# Altium PCB Game Joystick 510.PcbDoc (part 1 of 2)
Units mil, origin at the board's own origin, x right, y up, seen from the top; angles counter-clockwise.
Board outline 4889.97 x 4392.01 mil, 2 copper layers (Top Layer, Bottom Layer); 77 components, 82 nets, 383 pads, 99 vias.
Unrouted connection lines stored in the file: 79.
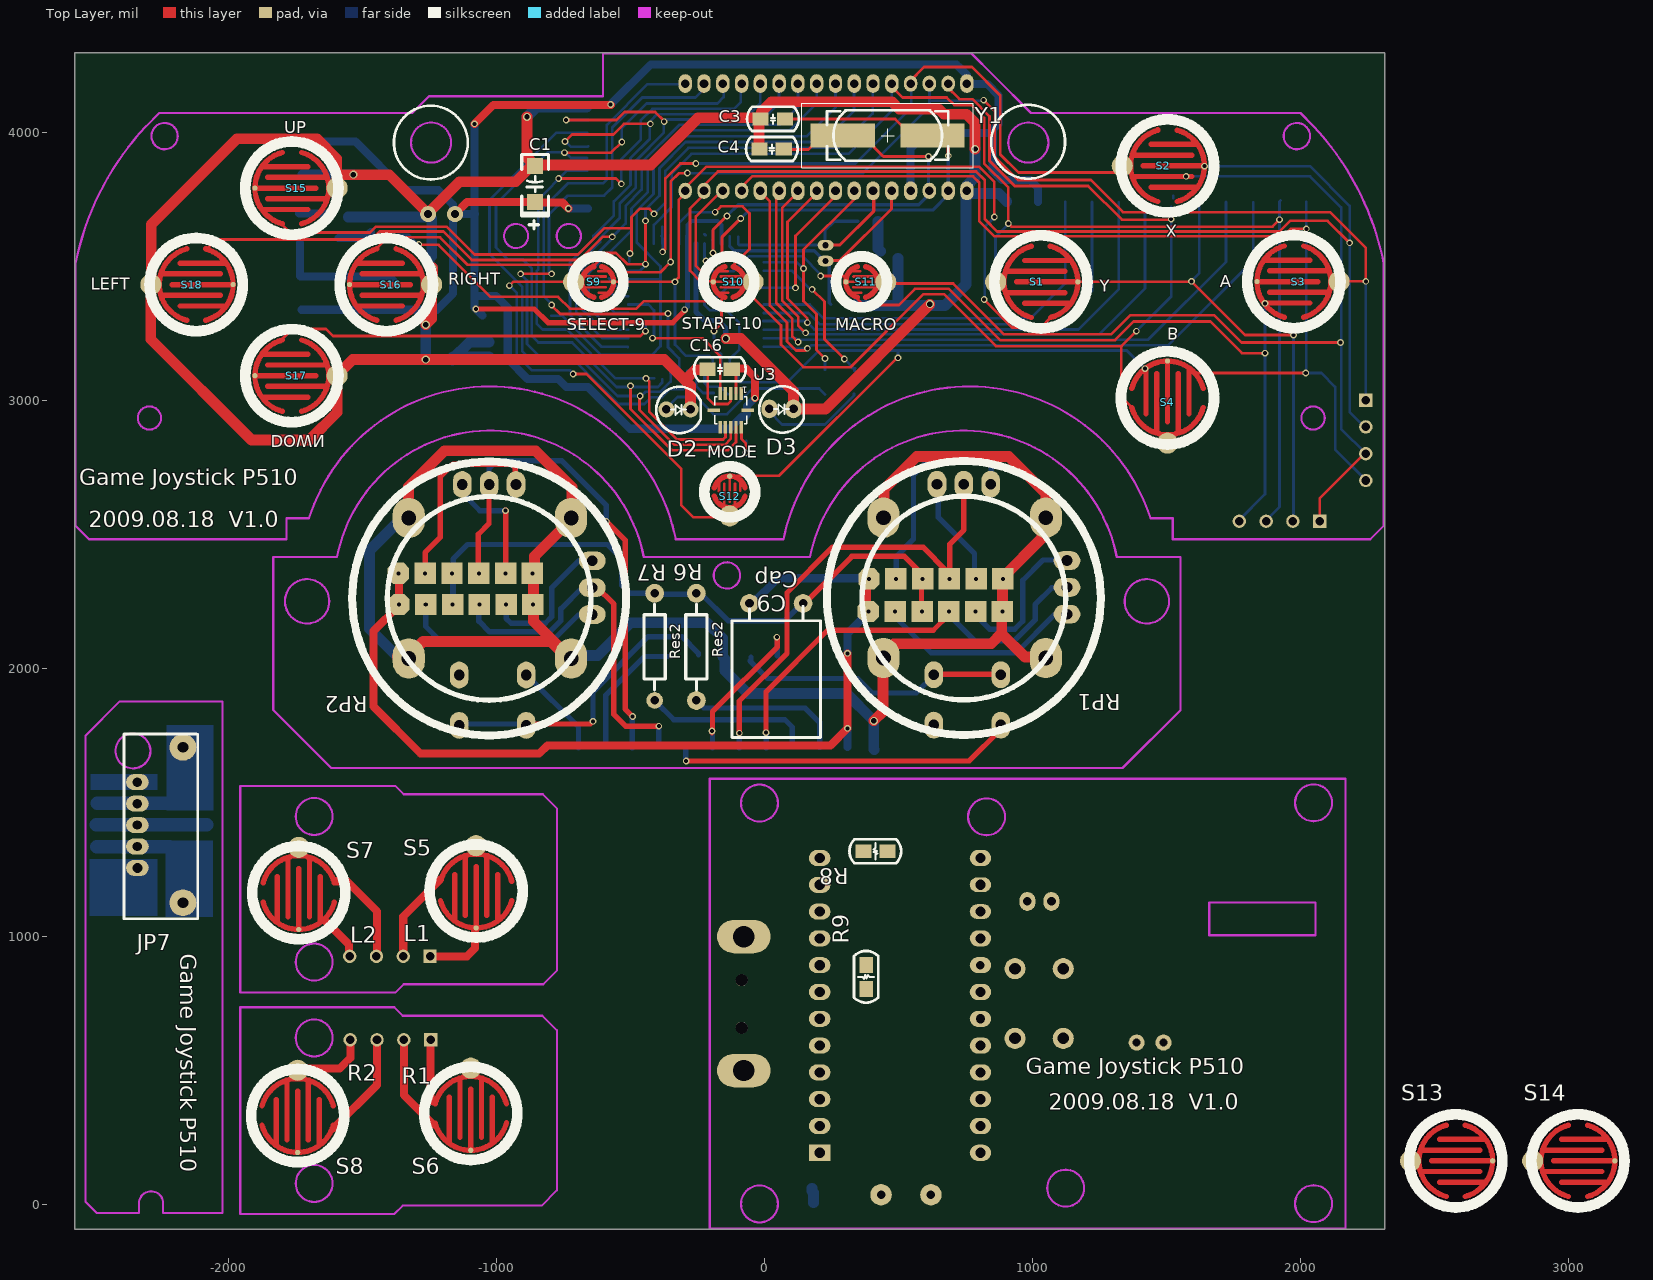
[diagram p0: Top Layer view]
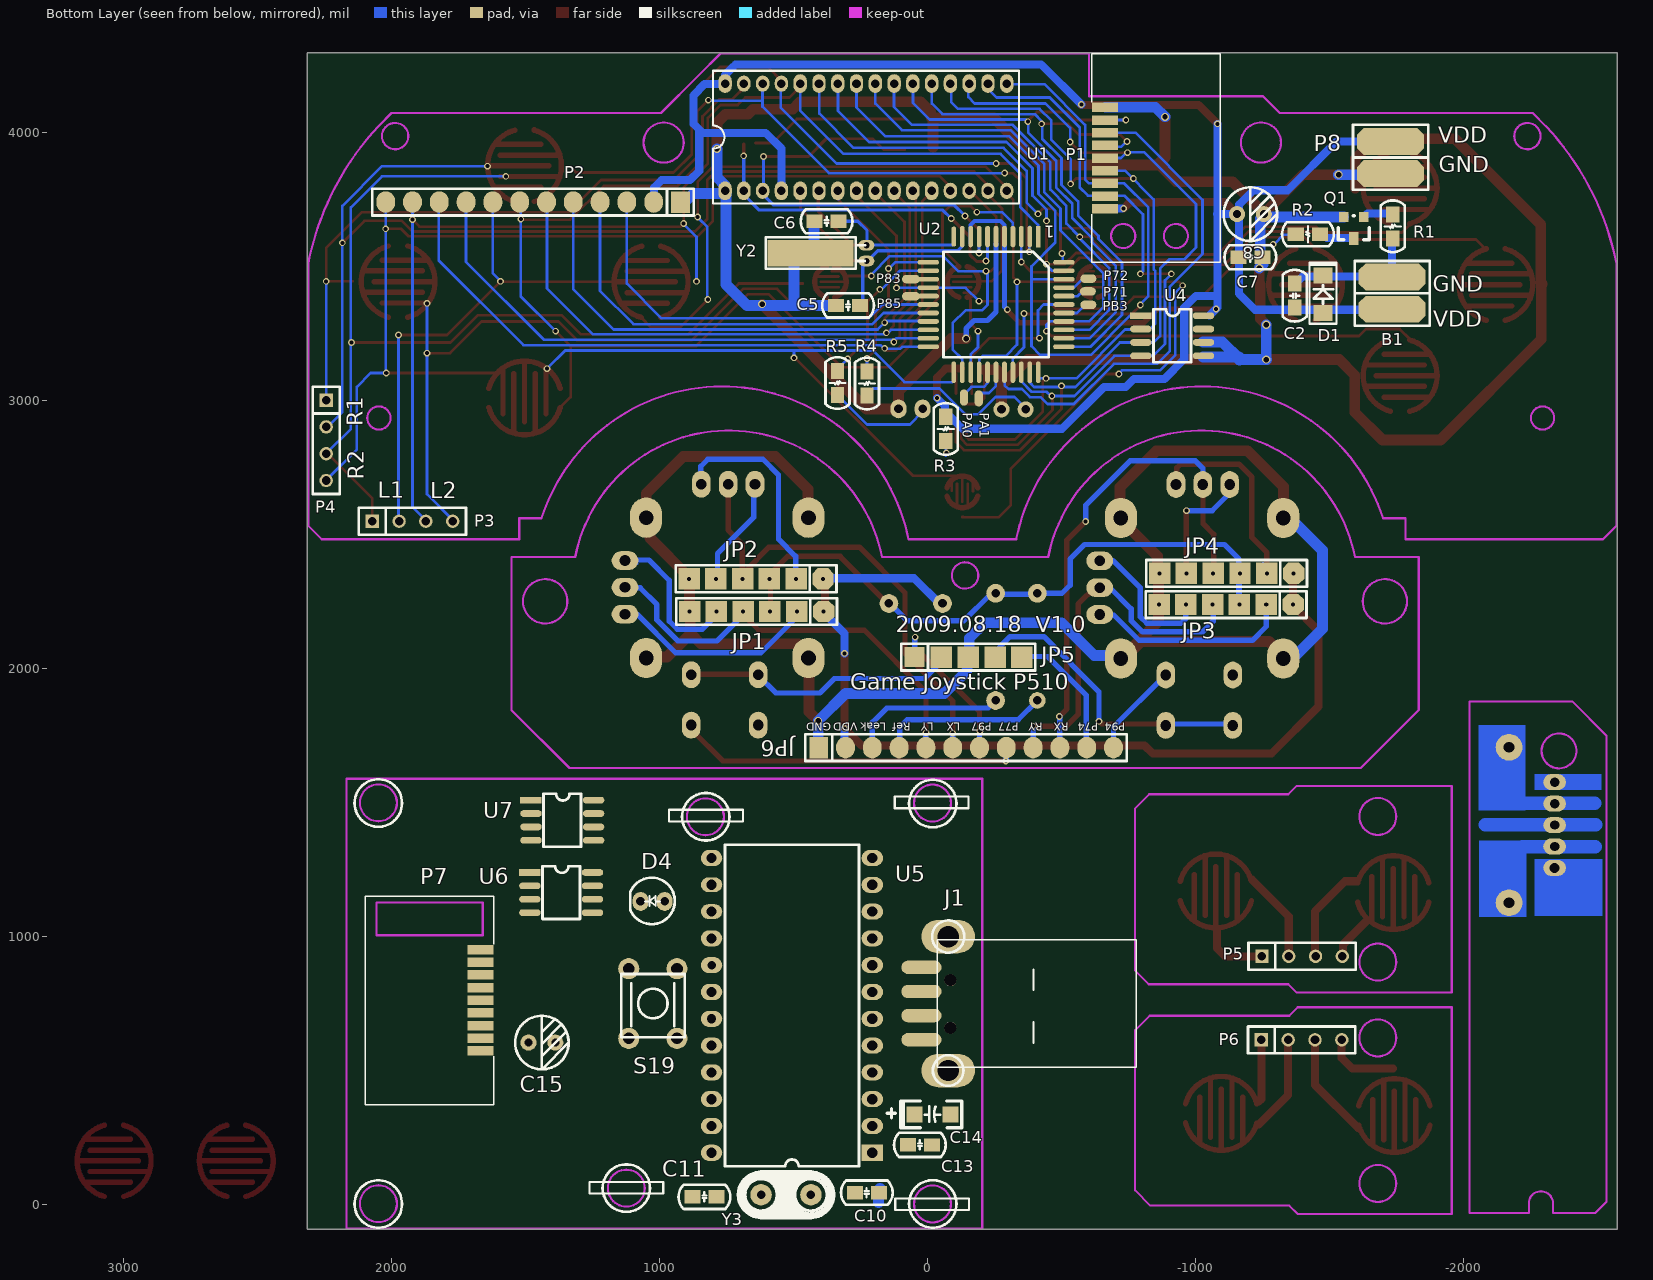
[diagram p1: Bottom Layer view, seen from below]

## Layer stack, top to bottom
Top Layer: signal copper 1.4
Dielectric: dielectric 12.6, FR-4, Dk 4.8
Bottom Layer: signal copper 1.4

## Board outline
-2575.91,-93.24 2314.06,-93.24 2314.06,4298.76 -2575.91,4298.76

## Design rules (kind name [scope] priority, off if disabled: settings)
Clearance [All] p1: gap=8
ComponentClearance [All] p1: gap=2 collisioncheckmode=3 verticalgap=10 showdistances=FALSE
FanoutControl Fanout_LCC [All] p1 off: bgadir=Out bgaviamode=Centered fanoutstyle=Auto fanoutdirection=Alternating viagrid=1 // Protel DXP Scope 1 Expression Was: IsLCC   Fanout_LCC (Default Rule)
FanoutControl Fanout_BGA [All] p2 off: bgadir=Out bgaviamode=Centered fanoutstyle=Auto fanoutdirection=Alternating viagrid=1 // Protel DXP Scope 1 Expression Was: IsBGA   Fanout_BGA (Default Rule)
FanoutControl Fanout_SOIC [All] p3 off: bgadir=Out bgaviamode=Centered fanoutstyle=Auto fanoutdirection=Alternating viagrid=1 // Protel DXP Scope 1 Expression Was: IsSOIC   Fanout_SOIC (Default Rule)
FanoutControl Fanout_Default [All] p4: bgadir=Out bgaviamode=Centered fanoutstyle=Auto fanoutdirection=Alternating viagrid=1 // Fanout_Default (Default Rule)
FanoutControl Fanout_Small [All] p5 off: bgadir=Out bgaviamode=Centered fanoutstyle=Auto fanoutdirection=Alternating viagrid=1 // Protel DXP Scope 1 Expression Was: (CompPinCount < 5)   Fanout_Small (Default Rule)
PolygonConnect [All] p1: connectstyle=Relief reliefconductorwidth=10 reliefentries=4 polygonreliefangle="90 Angle"
RoutingVias [All] p1: holewidth=15 width=25 viastyle="Through Hole" minholewidth=15 minwidth=25 maxholewidth=20 maxwidth=30
SolderMaskExpansion [All] p1: expansion=4
TestPointUsage [All] p1: valid=0 allowmultiple=FALSE
Testpoint [All] p1: side=15 testpointundercomponent=TRUE minsize=40 maxsize=100 preferedsize=60 minholesize=0 maxholesize=40 preferedholesize=32 testpointgrid=1 style=1023 order=0-112345678
Width [All] p1: maxlimit=50 minlimit=8 preferedwidth=10
13 further rules are at their usual default settings.

## Classes and differential pairs
component class EM78M611RX: C10 C11 C12 C13 C14 C15 D4 J1 P7 R8 R9 S19 U5 U6 U7 Y3
component class "Game Joystick rocker": C9 JP1 JP2 JP3 JP4 JP5 JP6 R6 R7 RP1 RP2
component class EM78P510_EM198810: B1 C1 C2 C3 C4 C5 C6 C7 C8 C16 D1 D2 D3 JP7 P1 P2 P3 P4 P5 P6 P8 Q1 R1 R2 R3 R4 R5 S1 S2 S3 S4 S5 S6 S7 S8 S9 S10 S11 S12 S13 S14 S15 S16 S17 S18 u1 U2 U3 U4 Y1 Y2

## Components (designator, comment, footprint, x,y, rotation, side; value= is the part's Value field where it differs from the comment)
B1 "Motor" SIP2 -1735.16,3350.76 r90 bottom
C1 "Cap Pol1" C1206-2 -857.16,3740.76 r90 top
C2 "Cap" C0805 -1371.16,3436.76 r270 bottom
C3 "Cap" C0805 -15.16,4050.76 r0 top
C4 "Cap" C0805 -19.16,3938.76 r0 top
C5 "Cap" C0805 340.84,3354.76 r180 bottom
C6 "Cap" C0805 420.84,3668.76 r180 bottom
C7 "Cap" C0805 -1251.16,3534.76 r0 bottom
C8 "Cap Pol1" RB5 -1156,3695.51 r180 bottom
C9 "Cap" CAPL 42.9,2242.76 r0 top
C10 "Cap" c0805 180,44 r0 bottom
C11 "Cap" c0805 786,28 r0 bottom
C13 "Cap" c0805 -18,222 r0 bottom
C14 "Cap Pol1" C1206-2 48,336 r180 bottom
C15 "Cap Pol1" RB5 1488,604 r180 bottom
C16 "Cap" C0805 -213.16,3116.76 r0 top
D1 "4148" D1407 -1477.16,3326.76 r90 bottom
D2 "LED1" led-3#1 -277.1,2966.76 r180 top locked
D3 "LED2" LED-3 107.23,2968.79 r180 top locked
D4 "LED" led-3#2 1069.9,1130.65 r180 bottom
J1 "353576-1" USBSD -3.16,894.76 r0 bottom locked
JP1 "HEADER 6" SIP6 386.9,2212.76 r0 bottom
JP2 "HEADER 6" SIP6 388.9,2334.76 r0 bottom
JP3 "HEADER 6" SIP6 -1365.1,2238.76 r0 bottom
JP4 "HEADER 6" SIP6 -1367.1,2354.76 r0 bottom
JP5 "HEADER 5" SIP5 46.9,2042.76 r180 bottom
JP6 "Header 12" SIP12 404.9,1704.76 r180 bottom
JP7 "HEADER 7" CON5 -2341.29,1255.8 r180 top
P1 "Header 9H" RFM -663.16,3715.97 r90 bottom
P2 "Header 12" SIP12 920.9,3740.76 r0 bottom
P3 "L1L2" SIP4 2070.9,2549.51 r180 bottom
P4 "R1R2" SIP4 2242.9,3001.51 r270 bottom
P5 "L1L2" SIP4 -1249.1,926.09 r180 bottom
P6 "R1R2" SIP4 -1247.1,614.09 r180 bottom
P7 "Header 9H" rfm 1666.9,950.76 r270 bottom
P8 "POWER" SIP2 -1729.16,3956.76 r270 bottom
Q1 "8050" SOT-23 -1629.16,3684.76 r0 bottom
R1 "Res2" R0805 -1737.16,3604.76 r90 bottom
R2 "Res2" R0805 -1375.16,3620.76 r180 bottom
R3 "Res2" R0805 -69.1,2939.51 r270 bottom
R4 "Res2" R0805 224.84,3108.76 r270 bottom
R5 "Res2" R0805 334.84,3110.76 r270 bottom
R6 "Res2" AXIAL0.4#1 -255.1,1880.76 r90 top
R7 "Res2" AXIAL0.4#2 -411.1,1880.76 r90 top
R8 "Res2" R0805 458,1318 r180 top
R9 "Res2" R0805 378,804 r90 top
RP1 "Rocker" Rocker 442.9,2562.76 r180 top locked
RP2 "Rocker" Rocker -1328.5,2561.66 r180 top locked
S1 "Y" KeyPad1#1 1168.25,3442.79 r0 top locked
S2 "X" KeyPad1#2 1640.69,3875.86 r0 top locked
S3 "A" KeyPad1#3 1836.69,3443.86 r180 top locked
S4 "B" KeyPad1#4 1502.9,3147.51 r90 top locked
S5 "L1-5" KeyPad1#5 -1077.1,1032 r270 top
S6 "R1-6" KeyPad1#6 -1097.1,202 r270 top
S7 "L2-7" KeyPad1#6 -1739.1,1026 r270 top
S8 "R2-8" KeyPad1#6 -1743.1,194 r270 top
S9 "SELECT-9" KeyPad2#1 -564.76,3442.79 r0 top locked
S10 "START-10" KeyPad2#2 -192.1,3442.76 r180 top
S11 "MACRO" KeyPad2#3 302.96,3442.79 r180 top locked
S12 "MODE" KeyPad2#4 -130.9,2717.59 r90 top locked
S13 "LSW1" KeyPad1#6 2716.36,162.69 r0 top
S14 "RSW2" KeyPad1#6 3172.36,162.69 r0 top
S15 "UP" KeyPad1#6 -1902.61,3792.71 r180 top locked
S16 "RIGHT" KeyPad1#6 -1549.7,3432.71 r180 top locked
S17 "DOWN" KeyPad1#6 -1902.61,3092.71 r180 top locked
S18 "LEFT" KeyPad1#1 -1984.11,3432.71 r0 top locked
S19 "RES" SW-PB 933.9,879.76 r270 bottom locked
U1 "EM78P510" SDIP32 754.41,3782.79 r180 bottom locked
U2 "EM78P510" QFP44 -257.16,3358.76 r0 bottom locked
U3 "BA020" LCC12 -127.1,2963.51 r180 top locked
U4 "93C46" SOP8 -797.16,3316.76 r270 bottom
U5 "EM78M611" DIP24 204.9,192.76 r0 bottom locked
U6 "24C02" sop8 1482.84,1238.76 r270 bottom
U7 "93C46" sop8 1478.84,1508.76 r270 bottom
Y1 "4M" XTAL1 550.84,3988.76 r180 top
Y2 "32768" XTAL2 226.84,3520.76 r90 bottom
Y3 "6M" CRY 434,36 r0 bottom

## Footprints (in the part's own frame and the unit in brackets; to place one, negate y for a bottom-side part, rotate by r counter-clockwise, add the part's x,y. Pads: shape width x height; smd on the part's side, far side on the other; paste and mask are expansions set on the pad)
AXIAL0.4#1 [mil]
  round 70 hole 32: 1(0,0) 2(400,0)
  silkscreen extent 40,-40 360,40
AXIAL0.4#2 [mil]
  round 62 hole 32: 1(0,0)
  round 70 hole 32: 2(400,0)
  silkscreen extent 40,-40 360,40
C0805 [mil]
  rect 60x50 smd: 1(0,0) 2(90.01,-0.01)
  silkscreen extent -51,-45 142,45
c0805 [mil]
  rect 60x50 smd: 1(0,0) 2(90.01,-0.01)
  silkscreen extent -51,-45 142,45
C1206-2 [mil]
  rect 60x60 smd: 1(0,0) 2(135,0)
  silkscreen extent -101,-50 177,50
CAPL [mil]
  round 70 hole 32: 1(100,0) 2(-100,0)
  silkscreen extent -165,-500 165,-10
CON5 [mil]
  oval 85x60 hole 38: 1(0,0)
  oval 85x60 hole 35: 2(0,-80) 3(0,-160) 4(0,-240) 5(0,-320)
  round 100 hole 40: 6(-170,130) 7(-170,-450)
  silkscreen extent -225,-500 50,190
CRY [mil]
  round 80 hole 32: 1(0,0) 2(186,0)
  silkscreen extent -85,-85 271,85
D1407 [mil]
  rect 60x70 smd: 1(0,0) 2(140,0)
  silkscreen extent -40,-50 188,50
DIP24 [mil]
  rect 80x60 hole 38: 1(0,0)
  oval 80x60 hole 38: 2(0,-100) 3(0,-200) 4(0,-300) 5(0,-400) 6(0,-500) 7(0,-600) 8(0,-700) 9(0,-800) 10(0,-900) 11(0,-1000) 12(0,-1100) 13(600,-1100) 16(600,-800) 18(600,-600) 20(600,-400) 21(600,-300) 22(600,-200) 23(600,-100) 24(600,0)
  oval 80x55 hole 38: 14(600,-1000) 15(600,-900)
  oval 80x60 hole 32: 17(600,-700)
  oval 80x60 hole 35: 19(600,-500)
  silkscreen extent 50,-1150 550,50
KeyPad1#1 [mm]
  round 0.5 smd: 1(0,0)
  round 2 smd: 2(-7.79,0)
  Top Layer lines w0.508: -6.675,-1.016 -1.214,-1.016 ; -6.675,1.016 -1.214,1.016 ; -5.786,0 -0.071,0 ; -5.024,-2.032 -0.796,-2.032 -0.706,-2.032 ; -5.024,2.032 -0.706,2.032 ; -4.409,-3.38 cw(c-3.5,0) -4.409,3.38 ; -2.597,3.381 cw(c-3.5,0) 0,0 cw(c-3.5,0) -0.674,-2.064 cw(c-3.5,0) -0.742,-2.155 cw(c-3.5,0) -0.796,-2.223 cw(c-3.5,0) -1.723,-3.016 cw(c-3.5,0) -2.198,-3.249 cw(c-3.5,0) -2.536,-3.365 cw(c-3.5,0) -2.591,-3.38
  silkscreen extent -7.91,-4.41 0.91,4.41
KeyPad1#2 [mm]
  round 0.5 smd: 1(0,0)
  round 2 smd: 2(-7.79,0)
  Top Layer lines w0.508: -6.675,-1.016 -1.723,-1.016 -1.214,-1.016 ; -6.675,1.016 -1.214,1.016 ; -5.786,0 -0.071,0 ; -5.024,-2.032 -0.796,-2.032 -0.706,-2.032 ; -5.024,2.032 -0.706,2.032 ; -4.409,-3.38 cw(c-3.5,0) -4.409,3.38 ; -2.597,3.381 cw(c-3.5,0) 0,0 cw(c-3.5,0) -0.674,-2.064 cw(c-3.5,0) -0.742,-2.155 cw(c-3.5,0) -0.796,-2.223 cw(c-3.5,0) -1.723,-3.016 cw(c-3.5,0) -2.198,-3.249 cw(c-3.5,0) -2.591,-3.38
  silkscreen extent -7.91,-4.41 0.91,4.41
KeyPad1#3 [mm]
  round 0.5 smd: 1(0,0)
  round 2 smd: 2(-7.79,0)
  Top Layer lines w0.508: -0.071,0 -5.786,0 ; -0.706,2.032 -0.766,2.032 -0.794,2.032 -2.849,2.032 -5.024,2.032 ; -0.706,-2.032 -0.796,-2.032 -5.024,-2.032 ; -1.214,1.016 -6.675,1.016 ; -1.214,-1.016 -6.675,-1.016 ; -2.591,-3.38 ccw(c-3.5,0) -2.198,-3.249 ccw(c-3.5,0) -1.723,-3.016 ccw(c-3.5,0) -0.796,-2.223 ccw(c-3.5,0) -0.742,-2.155 ccw(c-3.5,0) -0.674,-2.064 ccw(c-3.5,0) 0,0 ccw(c-3.5,0) -2.597,3.381 ; -4.409,3.38 ccw(c-3.5,0) -4.409,-3.38
  silkscreen extent -7.91,-4.41 0.91,4.41
KeyPad1#4 [mm]
  round 0.5 smd: 1(0,0)
  round 2 smd: 2(-7.79,0)
  Top Layer lines w0.508: -2.597,3.381 cw(c-3.5,0) 0,0 cw(c-3.5,0) -0.674,-2.064 cw(c-3.5,0) -0.742,-2.155 cw(c-3.5,0) -0.796,-2.223 cw(c-3.5,0) -1.137,-2.582 cw(c-3.5,0) -1.723,-3.016 cw(c-3.5,0) -2.198,-3.249 cw(c-3.5,0) -2.591,-3.38 ; -4.409,3.38 ccw(c-3.5,0) -4.414,3.378 ccw(c-3.5,0) -4.409,-3.38 ; -5.024,2.032 -0.73,2.032 -0.706,2.032 ; -6.675,1.016 -1.214,1.016 ; -5.786,0 -0.071,0 ; -6.675,-1.016 -1.214,-1.016 ; -5.024,-2.032 -0.796,-2.032 -0.706,-2.032
  silkscreen extent -7.91,-4.41 0.91,4.41
KeyPad1#5 [mm]
  round 0.5 smd: 1(0,0)
  round 2 smd: 2(-7.79,0)
  Top Layer lines w0.508: -2.591,-3.38 ccw(c-3.5,0) -2.198,-3.249 ccw(c-3.5,0) -1.723,-3.016 ccw(c-3.5,0) -0.796,-2.223 ccw(c-3.5,0) -0.742,-2.155 ccw(c-3.5,0) -0.674,-2.064 ccw(c-3.5,0) 0,0 ccw(c-3.5,0) -2.597,3.381 ; -4.409,-3.38 cw(c-3.5,0) -4.409,3.38 ; -0.706,-2.032 -0.742,-2.032 -0.796,-2.032 -5.024,-2.032 ; -1.214,-1.016 -6.675,-1.016 ; -0.071,0 -5.786,0 ; -1.214,1.016 -6.675,1.016 ; -0.706,2.032 -5.024,2.032
  silkscreen extent -7.91,-4.41 0.91,4.41
KeyPad1#6 [mm]
  round 0.5 smd: 1(0,0)
  round 2 smd: 2(-7.79,0)
  Top Layer lines w0.508: -2.591,-3.38 ccw(c-3.5,0) -2.198,-3.249 ccw(c-3.5,0) -1.723,-3.016 ccw(c-3.5,0) -0.796,-2.223 ccw(c-3.5,0) -0.742,-2.155 ccw(c-3.5,0) -0.674,-2.064 ccw(c-3.5,0) 0,0 ccw(c-3.5,0) -2.597,3.381 ; -4.409,-3.38 cw(c-3.5,0) -4.409,3.38 ; -0.706,-2.032 -0.796,-2.032 -5.024,-2.032 ; -1.214,-1.016 -6.675,-1.016 ; -0.071,0 -5.786,0 ; -1.214,1.016 -6.675,1.016 ; -0.706,2.032 -5.024,2.032
  silkscreen extent -7.91,-4.41 0.91,4.41
KeyPad2#1 [mm]
  round 0.5 smd: 1(0,0)
  round 2 smd: 2(-3.77,0)
  Top Layer lines w0.254: -3.004,-0.508 -0.718,-0.508 ; -3.004,0.508 -0.718,0.508 ; -2.394,0 0,0 0.02,0 0.044,0 ; -1.421,1.016 -0.376,1.016 -0.337,1.016 ; -1.37,-1.016 -0.458,-1.016 -0.407,-1.016 -0.376,-1.016 -0.337,-1.016
  Top Layer lines w0.508: -1.87,-1.449 cw(c-1.48,0) -1.941,1.428 cw(c-1.48,0) -1.87,1.449 ; -1.093,1.449 cw(c-1.48,0) -0.376,1.016 cw(c-1.48,0) 0.02,0 cw(c-1.48,0) -0.376,-1.016 cw(c-1.48,0) -0.407,-1.048 cw(c-1.48,0) -0.416,-1.057 cw(c-1.48,0) -1.09,-1.449
  silkscreen extent -3.89,-2.41 0.93,2.41
KeyPad2#2 [mm]
  round 0.5 smd: 1(0,0)
  round 2 smd: 2(-3.77,0)
  Top Layer lines w0.254: 0.044,0 0.027,0 0.02,0 0,0 -2.394,0 ; -0.337,1.016 -0.376,1.016 -1.421,1.016 ; -0.337,-1.016 -0.376,-1.016 -0.407,-1.016 -0.458,-1.016 -1.37,-1.016 ; -0.718,0.508 -3.004,0.508 ; -0.718,-0.508 -3.004,-0.508
  Top Layer lines w0.508: -1.09,-1.449 ccw(c-1.48,0) -0.416,-1.057 ccw(c-1.48,0) -0.407,-1.048 ccw(c-1.48,0) -0.376,-1.016 ccw(c-1.48,0) 0.02,0 ccw(c-1.48,0) -0.376,1.016 ccw(c-1.48,0) -1.031,1.431 ccw(c-1.48,0) -1.093,1.449 ; -1.87,1.449 ccw(c-1.48,0) -2.034,-1.394 ccw(c-1.48,0) -1.87,-1.449
  silkscreen extent -3.89,-2.41 0.93,2.41
KeyPad2#3 [mm]
  round 0.5 smd: 1(0,0)
  round 2 smd: 2(-3.77,0)
  Top Layer lines w0.254: 0.044,0 -2.394,0 ; -0.337,1.016 -0.376,1.016 -1.421,1.016 ; -0.337,-1.016 -0.376,-1.016 -0.404,-1.016 -0.407,-1.016 -0.454,-1.016 -0.458,-1.016 -1.37,-1.016 ; -0.718,0.508 -3.004,0.508 ; -0.718,-0.508 -3.004,-0.508
  Top Layer lines w0.508: -1.09,-1.449 ccw(c-1.48,0) -0.416,-1.057 ccw(c-1.48,0) -0.407,-1.048 ccw(c-1.48,0) -0.376,-1.016 ccw(c-1.48,0) -0.258,-0.87 ccw(c-1.48,0) -0.376,1.016 ccw(c-1.48,0) -1.093,1.449 ; -1.87,1.449 ccw(c-1.48,0) -1.87,-1.449
  silkscreen extent -3.89,-2.41 0.93,2.41
KeyPad2#4 [mm]
  round 0.5 smd: 1(0,0)
  round 2 smd: 2(-3.77,0)
  Top Layer lines w0.254: -1.421,1.016 -0.376,1.016 -0.337,1.016 ; -3.004,0.508 -0.718,0.508 ; -2.394,0 0,0 0.02,0 0.044,0 ; -3.004,-0.508 -0.718,-0.508 ; -1.37,-1.016 -0.458,-1.016 -0.407,-1.016 -0.376,-1.016 -0.337,-1.016
  Top Layer lines w0.508: -1.87,1.449 ccw(c-1.48,0) -1.87,-1.449 ; -1.093,1.449 cw(c-1.48,0) -0.376,1.016 cw(c-1.48,0) 0.02,0 cw(c-1.48,0) -0.376,-1.016 cw(c-1.48,0) -0.407,-1.048 cw(c-1.48,0) -0.416,-1.057 cw(c-1.48,0) -1.09,-1.449
  silkscreen extent -3.89,-2.41 0.93,2.41
LCC12 [mm]
  rect 0.32x1.2 smd: 1(-1,-1.6) 2(-0.5,-1.6) 3(0,-1.6) 4(0.5,-1.6) 5(1,-1.6) 6(1,1.6) 7(0.5,1.6) 8(0,1.6) 9(-0.5,1.6) 10(-1,1.6)
  rect 1.2x0.32 smd: 11(-1.6,0) 12(1.6,0)
  silkscreen extent -1.52,-1.3 1.52,1.27
led-3#1 [mil]
  round 60 hole 32.01: 1(90,0) 2(0,0)
  silkscreen extent -38,-85 128,89
led-3#2 [mil]
  oval 60x70 hole 32.01: 1(90,0) 2(0,0)
  silkscreen extent -38,-85 128,89
LED-3 [mil]
  oval 60x70 hole 32.01: 1(90,0) 2(0,0)
  silkscreen extent -38,-85 128,89
QFP44 [mm]
  rect 0.45x2.032 smd: 1(-3.988,-6.43)
  oval 0.45x2.032 smd: 2(-3.188,-6.43) 3(-2.388,-6.43) 4(-1.588,-6.43) 5(-0.788,-6.43) 6(0.012,-6.43) 7(0.812,-6.43) 8(1.612,-6.43) 9(2.412,-6.43) 10(3.212,-6.43) 23(4.013,6.43) 24(3.213,6.43) 25(2.413,6.43) 26(1.613,6.43) 27(0.813,6.43) 28(0.013,6.43) 29(-0.787,6.43) 30(-1.587,6.43) 31(-2.387,6.43) 32(-3.187,6.43) 33(-3.987,6.43)
  oval 0.45x1.905 smd: 11(4.012,-6.43)
  oval 2.032x0.45 smd: 12(6.43,-3.988) 13(6.43,-3.188) 14(6.43,-2.388) 15(6.43,-1.588) 16(6.43,-0.788) 17(6.43,0.012) 18(6.43,0.812) 19(6.43,1.612) 20(6.43,2.412) 21(6.43,3.212) 22(6.43,4.012) 34(-6.422,4.011) 35(-6.422,3.212) 36(-6.422,2.412) 37(-6.422,1.612) 38(-6.422,0.812) 39(-6.422,0.012) 40(-6.422,-0.788) 41(-6.422,-1.588) 42(-6.422,-2.388) 43(-6.422,-3.188) 44(-6.422,-3.988)
  silkscreen extent -5,-4.99 4.99,5.01
R0805 [mil]
  rect 60x50 smd: 1(0,0) 2(90,0)
  silkscreen extent -51,-45 142,45
RB5 [mil]
  round 60 hole 30: 1(0,0) 2(100,0)
  silkscreen extent -50,-100 150,100
RFM [mm]
  rect 0.9x2.5 smd: 1(0,0) 2(1.2,0) 3(2.4,0) 4(3.6,0) 5(4.8,0) 6(6,0) 7(7.2,0) 8(8.4,0) 9(9.6,0)
  silkscreen extent -5.08,-10.92 14.68,1.27
rfm [mm]
  rect 0.9x2.5 smd: 1(0,0) 2(1.2,0) 3(2.4,0) 4(3.6,0) 5(4.8,0) 6(6,0) 7(7.2,0) 8(8.4,0) 9(9.6,0)
  silkscreen extent -5.08,-10.92 14.68,1.27
Rocker [mil]
  oval 100x70 hole 40: 1(-685,360) 2(-685,260) 3(-685,160)
  oval 70x100 hole 40: 4(-400,-125) 5(-300,-125) 6(-200,-125) 7(-188.01,585.98) 8(-438,586) 9(-188,774) 10(-438,774)
  oval 120x150 hole 55: 11(-606,524) 12(-606,0) 13(0,0) 14(0,524)
  silkscreen extent -811,-211 211,811
SDIP32 [mil]
  oval 50x70 hole 32: 1(0,0) 2(70.08,0) 4(210.24,0) 5(280.32,0) 6(350.39,0) 7(420.47,0) 8(490.55,0) 9(560.63,0) 10(630.71,0) 11(700.79,0) 12(770.87,0)
  oval 50x60 hole 32: 3(140.16,0) 13(840.94,0) 14(911.02,0) 15(981.1,0) 16(1051.18,0)
  oval 50x70 hole 32.01: 17(1051.18,400) 18(981.1,400) 19(911.02,400) 20(840.94,400) 21(770.87,400) 22(700.79,400) 23(630.71,400) 24(560.63,400) 25(490.55,400) 26(420.47,400) 27(350.39,400) 28(280.31,400) 32(0,400)
  oval 50x60 hole 32.01: 29(210.24,400) 30(140.16,400) 31(70.08,400)
  silkscreen extent -45,-48 1096,448
SIP2 [mil]
  oct 100x250 smd: 1(-10,0) 2(110,0)
  silkscreen extent -72,-140 170,140
SIP4 [mil]
  rect 50x50 hole 32: 1(0,0)
  round 50 hole 32: 2(100,0) 3(200,0) 4(300,0)
  silkscreen extent -50,-50 350,50
SIP5 [mil]
  rect 75x75 smd: 1(0,0)
  rect 80x80 smd: 2(100,0) 3(200,0) 4(300,0) 5(400,0)
  silkscreen extent -50,-50 450,50
SIP6 [mil]
  oct 80x80 hole 15: 1(0,0)
  rect 80x80 hole 15: 2(100,0) 3(200,0) 4(300,0) 5(400,0) 6(500,0)
  silkscreen extent -50,-50 550,50
SIP12 [mil]
  rect 70x80 smd: 1(0,0)
  oval 70x80 smd: 2(100,0) 3(200,0) 4(300,0) 5(400,0) 6(500,0) 7(600,0) 8(700,0) 9(800,0) 10(900,0) 11(1000,0) 12(1100,0)
  silkscreen extent -50,-50 1150,50
SOP8 [mil]
  rect 25x80 smd: 1(0,0)
  oval 25x80 smd: 2(50,0) 3(100,0) 4(150,0) 5(150,233.78) 6(100,233.78) 7(50,233.78) 8(0,233.78)
  silkscreen extent -23,47 173,187
sop8 [mil]
  rect 25x80 smd: 1(0,0)
  oval 25x80 smd: 2(50,0) 3(100,0) 4(150,0) 5(150,233.78) 6(100,233.78) 7(50,233.78) 8(0,233.78)
  silkscreen extent -23,47 173,187
SOT-23 [mil]
  rect 36x36 smd: 1(0,0) 3(75,0)
  rect 36x50 smd: 2(38,80)
  silkscreen extent -20,-5 95,85
SW-PB [mm]
  round 2 hole 1.1: 1(0,0) 1(6.604,0) 2(0,-4.572) 2(6.604,-4.572)
  silkscreen extent 0.5,-5.27 6.5,0.73
USBSD [mil]
  oval 150x50 smd: 1(25,280) 2(25,190) 3(25,100) 4(25,10)
  oval 200x125 hole 80: 5(-75,-105) 6(-75,395)
  round 45 hole 45: ""(-82.68,57.87) ""(-82.68,235.83)
  silkscreen extent -777,-165 -15,452
XTAL1 [mil]
  rect 240x90 smd: 1(-75,0) 2(260,0)
  silkscreen extent -228,-120 412,120
XTAL2 [mm]
  oval 1x1.5 hole 0.6: 1(0,0) 2(1.5,0)
  rect 2.5x8.128 smd: ""(0.75,5.305)
  silkscreen extent -0.75,0.1 2.25,9.56

## Part data
S13 S14: library part SW-PB, "Switch"

## Free pads (board coordinates)
  oval 60x31.5 smd far side: 0(-601.1,3455.1) 1(-599.1,3407.1) 2(-601.1,3357.1)
  oval 31.5x60 smd far side: 3(-137.1,3011.1) 4(-192,3008)
  oval 66.93x31.5 smd far side: 5(60.9,3453.1) 6(60.9,3389.1)

## Via types
v1: diameter 25, hole 15, Top Layer to Bottom Layer, 90 vias
v2: diameter 30, hole 20, Top Layer to Bottom Layer, 9 vias

## Nets (pads, with @x,y where several pads share a name; then routed paths per layer and width w, separated by ;. In a path a pad name is that pad's centre, name@x,y a point inside that pad or via, vN(x,y) a via of type N, cw(c..) or ccw(c..) an arc to the next point about the centre after c; other vN are vias at no path point)
1: JP7.1
3: JP7.3 | length 432.1
  Bottom Layer w50: -2495.16,1417.31 JP7.3@-2333.1,1416.76 ; JP7.3@-2353.1,1416.76 -2083.1,1416.76
5: JP7.5
93C46_CS_P73: U1.25 U2.42 U4.1 | length 2194.6
  Bottom Layer w10: U4.1@-797.16,3316.76 -756.76,3316.76 -610.76,3170.76 -421.15,3170.76 -389.16,3202.76 -389.16,3500.76 -477.16,3588.76 -477.16,3708.76 -415.16,3770.76 -415.16,3876.76 -305.16,3986.76 156.84,3986.76 263.86,4093.78 U1.25@263.86,4182.79 ; U2.42@-510.01,3452.77 -391.16,3452.77
BM020_CBS_P70: U2.39 U3.5 | length 632.1
  Top Layer w10: v1(-419.16,3232.76) -233.16,3232.76 -166.47,3166.08 U3.5@-166.47,3026.51
  Bottom Layer w10: U2.39@-510.01,3358.28 -434.68,3358.28 -413.16,3336.76 -413.16,3238.76 v1(-419.16,3232.76)
FIFO_FLAG_P65: P7.7 U5.19
FIFO_FLAG_PA2: P1.7 U2.29 | length 1863.4
  Bottom Layer w10: P1.7@-663.16,3999.44 -776.48,3999.44 -1027.16,3748.76 -1027.16,3546.76 -905.16,3424.76 -905.16,3184.76 -857.16,3136.76 -696.76,3136.76 -546.76,2986.76 -449.15,2986.76 -423.16,3012.76 -383.17,3012.76 -353.16,3042.76 -303.16,3042.76 -289.16,3056.76 U2.29@-289.16,3110.76
GND: C1.2 C3.1 C4.1 C5.1 C6.1 C7.1 C8.2 C10.1 C11.2 C13.1 C14.2 C15.2 C16.1 D2.2 D3.2 D4.2 J1.4 J1.5 J1.6 JP1.6 JP2.6 JP3.6 JP4.6 JP5.3 JP6.1 JP7.2 JP7.4 JP7.6 JP7.7 P1.9 P2.1 P7.9 P8.2 Q1.3 RP1.11 RP1.12 RP1.13 RP1.14 RP2.11 RP2.12 RP2.13 RP2.14 S15.2 S16.2 S17.2 S18.2 S19.1@933.9,619.76 U1.1 U2.6 U3.3 U4.5 U4.6 U5.2 U5.9 U6.1 U6.2 U6.3 U6.4 U7.5 U7.6 Y2. | length 19010.2
  Top Layer w10: -277.16,3000.76 D2.2@-263.16,2986.76 ; C16.1@-213.16,3114.76 -213.16,3008.76 -191.16,2986.76 -137.16,2986.76 -130.82,2993.09 -127.1,2996.81 U3.3@-127.1,3026.51
  Top Layer w40: S18.2@-2295.16,3434.76 -2289.16,3440.76 -2289.16,3656.76 -1969.16,3976.76 -1671.16,3976.76 -1597.16,3902.76 S15.2@-1597.16,3792.76 ; S18.2@-2291.16,3422.76 -2291.16,3228.76 -1915.16,2852.76 -1699.16,2852.76 -1595.16,2956.76 -1595.16,3094.76 -1537.16,3152.76 -375.17,3152.76 -277.16,3054.76 D2.2@-277.1,2966.76 ; -1591.16,3842.76 v2@-1537.16,3842.76 ; v2(-1535.16,3842.76) -1401.16,3842.76 C8.2@-1261.16,3702.76 ; RP2.14@-1371.16,2044.76 RP2.14@-1337.16,2044.76 ; RP2.14@-1331.16,2044.76 -1275.16,2100.76 -799.16,2100.76 RP2.11@-731.16,2032.76 ; RP2.13@-1329.16,2568.76 -1329.16,2678.76 -1195.16,2812.76 -855.16,2812.76 -719.16,2676.76 RP2.12@-719.16,2556.76 ; v2(-1265.16,3282.76) -1243.01,3304.91 S16.2@-1243.01,3432.71 ; C8.2@-1257.16,3698.76 -1139.16,3816.76 -929.16,3816.76 C1.2@-869.16,3876.76 ; S16.2@-1239.16,3448.76 v2(-1239.16,3494.76) ; v2(-887.16,4058.76) -887.16,3906.76 C1.2@-863.16,3882.76 ; JP4.6@-863.16,2354.76 -863.16,2176.76 RP2.11@-721.16,2034.76 ; JP4.6@-859.16,2358.76 -859.16,2418.76 RP2.12@-725.16,2552.76 ; C1.2@-855.16,3878.76 -425.16,3878.76 -249.16,4054.76 C3.1@-15.16,4054.76 ; -293.16,3080.76 -259.16,3114.76 C16.1@-213.16,3114.76 ; v2(-145.16,3231.1) -89.51,3231.1 106.84,3034.76 D3.2@106.84,2972.76 ; C4.1@-21.16,3944.76 C3.1@-21.16,4046.76 ; C3.1@-13.16,4060.76 -13.16,4076.76 24.84,4114.76 474.84,4114.76 502.19,4087.41 650.59,4087.41 669.25,4068.76 752.85,4068.76 784.84,4036.76 v2(784.84,3938.76) ; D3.2@107.23,2968.79 226.58,2968.79 615.84,3358.05 v2(615.84,3359.76) ; v2(406.84,1804.76) 440.84,1838.76 RP1.14@440.84,2030.76 ; RP1.14@434.84,2046.76 480.84,2092.76 844.84,2092.76 882.84,2130.76 ; RP1.13@444.84,2576.76 444.84,2668.76 566.84,2790.76 910.84,2790.76 1048.84,2652.76 RP1.12@1048.84,2560.76 ; JP1.6@884.84,2214.76 884.84,2128.76 970.84,2042.76 RP1.11@1036.84,2042.76 ; JP1.6@886.9,2212.76 886.9,2338.82 1034.84,2486.76 RP1.12@1034.84,2562.76
  Bottom Layer w20: U2.6@-256.68,3585.91 -256.68,3330.28 -225.16,3298.76 -175.16,3298.76 -145.16,3268.76 v2(-145.16,3231.1)
  Bottom Layer w40: P8.2@-1723.16,3842.76 v2(-1535.16,3842.76) ; Q1.3@-1554.16,3684.76 C8.2@-1269.85,3684.76 ; RP2.14@-1371.16,2044.76 -1475.16,2148.76 -1475.16,2440.76 RP2.13@-1365.16,2550.76 ; v2@-1267.16,3152.76 -1167.16,3152.76 -1101.16,3218.76 U4.6@-1029.16,3218.76 ; v2(-1265.16,3152.76) v2(-1265.16,3282.76) ; C8.2@-1257.16,3692.76 -1243.16,3678.76 C7.1@-1243.16,3538.76 ; C7.1@-1253.16,3536.76 -1253.16,3508.76 v2(-1239.16,3494.76) ; -1165.16,3150.76 -1164.36,3155.56 -1163.16,3162.76 U4.5@-1029.16,3162.76 ; v2(-887.16,4058.76) -851.16,4094.76 P1.9@-665.16,4094.76 ; RP2.11@-701.16,2048.76 -623.16,2048.76 -501.16,2170.76 -215.16,2170.76 -157.16,2112.76 JP5.3@-157.16,2044.76 ; JP5.3@-149.16,2036.76 -149.16,1992.76 -63.16,1906.76 304.84,1906.76 v2@404.84,1806.76 ; C10.1@176,50 C10.1@176,60 ; 182,6 C10.1@182,44 ; C5.1@340.84,3358.76 344.85,3354.76 672.55,3354.76 750.84,3433.05 750.84,3772.76 872.84,3772.76 P2.1@902.84,3742.76 ; v2(406.84,1804.76) 406.84,1698.76 JP6.1@408.84,1696.76 ; C6.1@422.84,3668.76 422.84,3566.76 Y2.@432.84,3556.76 ; 496.84,3368.76 Y2.@496.84,3530.76 ; U1.1@754.84,3784.76 754.84,3802.76 784.84,3832.76 v2(784.84,3938.76)
  Bottom Layer w50: -2493.1,1334.76 -2221.05,1334.21 ; -2491.1,1496.76 -2233.05,1496.76
IIC_SCI_P54: U5.10 U6.6
IIC_SDA_P55: U5.11 U6.5
LEAKRESIS: JP6.3 P2.3 R6.1 U2.17 | length 2090
  Bottom Layer w10: U2.17@-4.01,3358.28 167.32,3358.28 218.84,3306.76 990.84,3306.76 1120.9,3436.82 P2.3@1120.9,3740.76
  Bottom Layer w20: R6.1@-255.1,1880.76 -227.11,1852.76 150.84,1852.76 204.84,1798.76 JP6.3@204.84,1706.76
LX_P91/AD2: JP2.4 JP6.6 P2.6 RP1.5 U1.10 U2.20 | length 4146.7
  Top Layer w10: U1.10@120.84,3774.76 64.9,3718.82 64.9,3372.7 124.84,3312.76 124.84,3279.16 151.24,3252.76 v1(152.84,3252.76)
  Top Layer w20: v1(-95.16,1758.76) -95.16,1878.76 82.84,2056.76 82.84,2282.76 252.84,2452.76 590.84,2452.76 JP2.4@680.84,2362.76 ; JP2.4@690.84,2332.76 690.84,2464.76 742.84,2516.76 RP1.5@742.84,2694.76
  Bottom Layer w10: v1(-95.16,1758.76) v1@-95.1,1758.71 ; U2.20@-4.01,3263.8 135.81,3263.8 152.84,3246.76 1246.84,3246.76 1418.84,3418.76 P2.6@1418.84,3740.76
  Bottom Layer w20: JP6.6@-95.1,1704.76 v1@-95.1,1758.71
LY_P90/AD3: JP1.4 JP6.5 P2.5 RP1.2 U1.9 U2.19 | length 3900.1
  Top Layer w10: v1(158.84,3290.76) 158.84,3306.76 84.84,3380.76 84.84,3666.76 188.84,3770.76 U1.9@188.84,3776.76
  Top Layer w20: v1(4.84,1760.76) 4.84,1912.76 234.84,2142.76 628.84,2142.76 JP1.4@688.84,2202.76
  Bottom Layer w10: U2.19@-5.16,3296.76 152.84,3296.76 184.84,3264.76 1170.84,3264.76 1320.84,3414.76 P2.5@1320.84,3738.76 ; v1(4.84,1760.76) v1@4.9,1760.71
  Bottom Layer w20: JP6.5@4.9,1704.76 v1@4.9,1760.71 ; JP1.4@678.84,2186.76 700.84,2186.76 784.84,2102.76 930.84,2102.76 1008.84,2180.76 1008.84,2238.76 1070.84,2300.76 RP1.2@1130.84,2300.76
NetB1_2: B1.2 C2.1 D1.2 R1.1 | length 495.6
  Bottom Layer w30: B1.2@-1735.16,3464.76 R1.1@-1735.16,3588.76 ; B1.2@-1733.16,3462.76 -1401.16,3462.76 C2.1@-1373.16,3434.76
NetC9_1: C9.1 JP1.3 JP2.3 JP3.3 JP4.3 R6.2 R7.2 | length 2490.1
  Top Layer w10: JP1.3@584.84,2220.76 JP1.3@590.84,2214.76
  Top Layer w20: C9.1@146.84,2240.76 324.84,2418.76 520.84,2418.76 590.84,2348.76 JP2.3@594.84,2348.76 ; JP1.3@584.84,2220.76 584.84,2322.76 JP2.3@594.84,2332.76
  Bottom Layer w10: JP3.3@-1169.16,2250.76 JP4.3@-1169.16,2358.76
  Bottom Layer w20: JP3.3@-1163.16,2236.76 -1163.16,2408.76 -1109.16,2462.76 -587.16,2462.76 -533.16,2408.76 -533.16,2310.76 -503.16,2280.76 R7.2@-413.16,2280.76 ; R7.2@-415.16,2276.76 -235.16,2276.76 -137.16,2178.76 74.84,2178.76 C9.1@144.84,2248.76
NetC10_2: C10.2 U5.1 Y3.1
NetC11_1: C11.1 U5.24 Y3.2
NetD2_1: D2.1 R4.2 | length 695.3
  Bottom Layer w10: D2.1@-375.16,2964.76 -373.16,2964.76 -324.82,3013.1 -255.1,3013.1 -191.1,2949.1 -141.1,2949.1 -45.44,3044.76 202.84,3044.76 R4.2@224.84,3022.76
NetD3_1: D3.1 R5.2 | length 400.6
  Bottom Layer w10: D3.1@16.84,2972.76 16.84,2958.76 64.84,2910.76 224.84,2910.76 332.84,3018.76 R5.2@332.84,3024.76
NetD4_1: D4.1 R8.1
NetJ1_2: J1.2 U5.5
NetJ1_3: J1.3 U5.4
NetJP1_2: JP1.2 RP1.1 | length 762
  Bottom Layer w20: JP1.2@482.84,2206.76 482.84,2196.76 620.84,2058.76 938.84,2058.76 1080.84,2200.76 RP1.1@1118.84,2200.76
NetJP1_5: JP1.5 RP1.3 | length 597.3
  Bottom Layer w10: RP1.3@1082.84,2390.76 RP1.3@1112.84,2390.76
  Bottom Layer w20: JP1.5@776.84,2188.76 796.84,2188.76 838.84,2146.76 932.84,2146.76 962.84,2176.76 962.84,2328.76 1038.84,2404.76 RP1.3@1130.84,2404.76
NetJP2_2: JP2.2 RP1.4 | length 835.3
  Top Layer w10: RP1.4@844.84,2692.76 RP1.4@844.84,2726.76
  Bottom Layer w20: JP2.2@490.84,2336.76 490.84,2418.76 554.84,2482.76 554.84,2722.76 612.84,2780.76 818.84,2780.76 844.84,2754.76 RP1.4@844.84,2690.76
NetJP2_5: JP2.5 RP1.6 | length 404.3
  Bottom Layer w20: RP1.6@646.84,2690.76 646.84,2564.76 782.84,2428.76 JP2.5@782.84,2342.76
NetJP3_2: JP3.2 RP2.1 | length 766.5
  Bottom Layer w10: JP3.2@-1265.1,2238.76 JP3.2@-1265.16,2240.76
  Bottom Layer w20: JP3.2@-1265.16,2240.76 -1265.16,2156.76 -1213.16,2104.76 -791.16,2104.76 -697.16,2198.76 RP2.1@-645.16,2198.76
NetJP3_5: JP3.5 RP2.3 | length 541.6
  Bottom Layer w10: RP2.3@-649.16,2398.76 RP2.3@-641.16,2398.76
  Bottom Layer w20: JP3.5@-965.16,2236.76 -965.16,2186.76 -947.16,2168.76 -819.16,2168.76 -795.16,2192.76 -795.16,2300.76 -693.16,2402.76 RP2.3@-649.16,2402.76
NetJP4_2: JP4.2 RP2.4 | length 830.9
  Top Layer w10: JP4.2@-1257.16,2346.76 JP4.2@-1257.16,2354.76
  Top Layer w20: JP4.2@-1267.16,2352.76 -1267.16,2432.76 -1211.16,2488.76 -1211.16,2714.76 -1163.16,2762.76 -945.16,2762.76 -931.16,2748.76 RP2.4@-931.16,2694.76
  Bottom Layer w10: JP4.2@-1253.16,2348.76 JP4.2@-1253.16,2392.76 ; RP2.4@-927.16,2696.76 RP2.4@-927.16,2730.76
NetJP4_5: JP4.5 RP2.6 | length 462.6
  Top Layer w20: v1@-967.16,2590.76 -967.16,2356.76 JP4.5@-965.16,2354.76
  Bottom Layer w10: RP2.6@-1127.16,2686.65 RP2.6@-1127.16,2690.76
  Bottom Layer w20: RP2.6@-1125.16,2688.76 -1125.16,2650.76 -1063.16,2588.76 v1(-967.16,2588.76)
NetJP5_2: JP5.2 RP1.7 RP1.8 | length 1053.8
  Top Layer w10: RP1.8@870.84,1954.76 RP1.8@870.84,1978.76
  Top Layer w20: RP1.7@630.9,1978.76 RP1.8@876.84,1978.76
  Bottom Layer w10: JP5.2@-53.16,2044.76 JP5.2@-51.16,2042.76
  Bottom Layer w20: JP5.2@-55.16,2028.76 10.84,1962.76 346.84,1962.76 400.84,1908.76 564.84,1908.76 RP1.7@630.84,1974.76 ; JP5.2@-51.16,2024.76 JP5.2@-51.16,2042.76
NetJP5_4: JP5.4 RP2.9 RP2.10 | length 1111.1
  Top Layer w20: RP2.10@-891.16,1792.76 -651.16,1792.76 v1(-641.16,1802.76)
  Bottom Layer w20: RP2.9@-1129.16,1792.76 RP2.10@-893.16,1792.76 ; v1(-641.16,1802.76) -641.16,1912.76 -435.16,2118.76 -309.17,2118.76 -247.16,2056.76 JP5.4@-247.16,2050.76
NetQ1_1: Q1.1 R1.2 | length 108.1
  Bottom Layer w30: R1.2@-1737.16,3698.76 -1643.16,3698.76 Q1.1@-1633.16,3688.76
NetQ1_2: Q1.2 R2.2 | length 131.1
  Bottom Layer w30: Q1.2@-1591.16,3606.76 -1491.16,3606.76 R2.2@-1469.16,3628.76
NetR3_2: R3.2 U3.10 | length 151.3
  Top Layer w10: U3.10@-87.16,2894.76 -87.16,2856.76 -71.16,2840.76 v1(-71.16,2804.76)
  Bottom Layer w10: v1@-69.1,2794.82 R3.2@-69.1,2849.51
NetR8_2: R8.2 U5.7
NetR9_2: R9.2 U5.8
NetS19_2: S19.2 U5.6
OSCI: C4.2 U1.3 U2.8 Y1.2 | length 1734.2
  Top Layer w10: C4.2@83.78,3936.76 162.84,3936.76 202.84,3976.76 Y1.2@360.84,3976.76 ; U1.3@612.84,3768.76 U1.3@612.84,3778.76
  Top Layer w12: v1@-195.16,3550.76 -193.16,3552.76 -193.16,3636.76 v1(-141.16,3688.76) ; Y1.2@378.84,3974.76 442.84,3910.76 v1(610.84,3910.76)
  Bottom Layer w10: U2.8@-195.16,3598.76 U2.8@-193.16,3600.76
  Bottom Layer w12: v1@-193.69,3552.24 U2.8@-193.69,3632.76 ; v1(-141.16,3688.76) -99.16,3730.76 574.85,3730.76 610.84,3766.76 v1(610.84,3910.76)
  other v1: -193.16,3550.76